# Altium PCB MacroQMK.PcbDoc
Units mil, origin at the board's own origin, x right, y up, seen from the top; angles counter-clockwise.
Board outline 3150 x 2955 mil, 2 copper layers (Top Layer, Bottom Layer), stack 61.855 mil thick; 46 components, 52 nets, 234 pads, 22 vias.
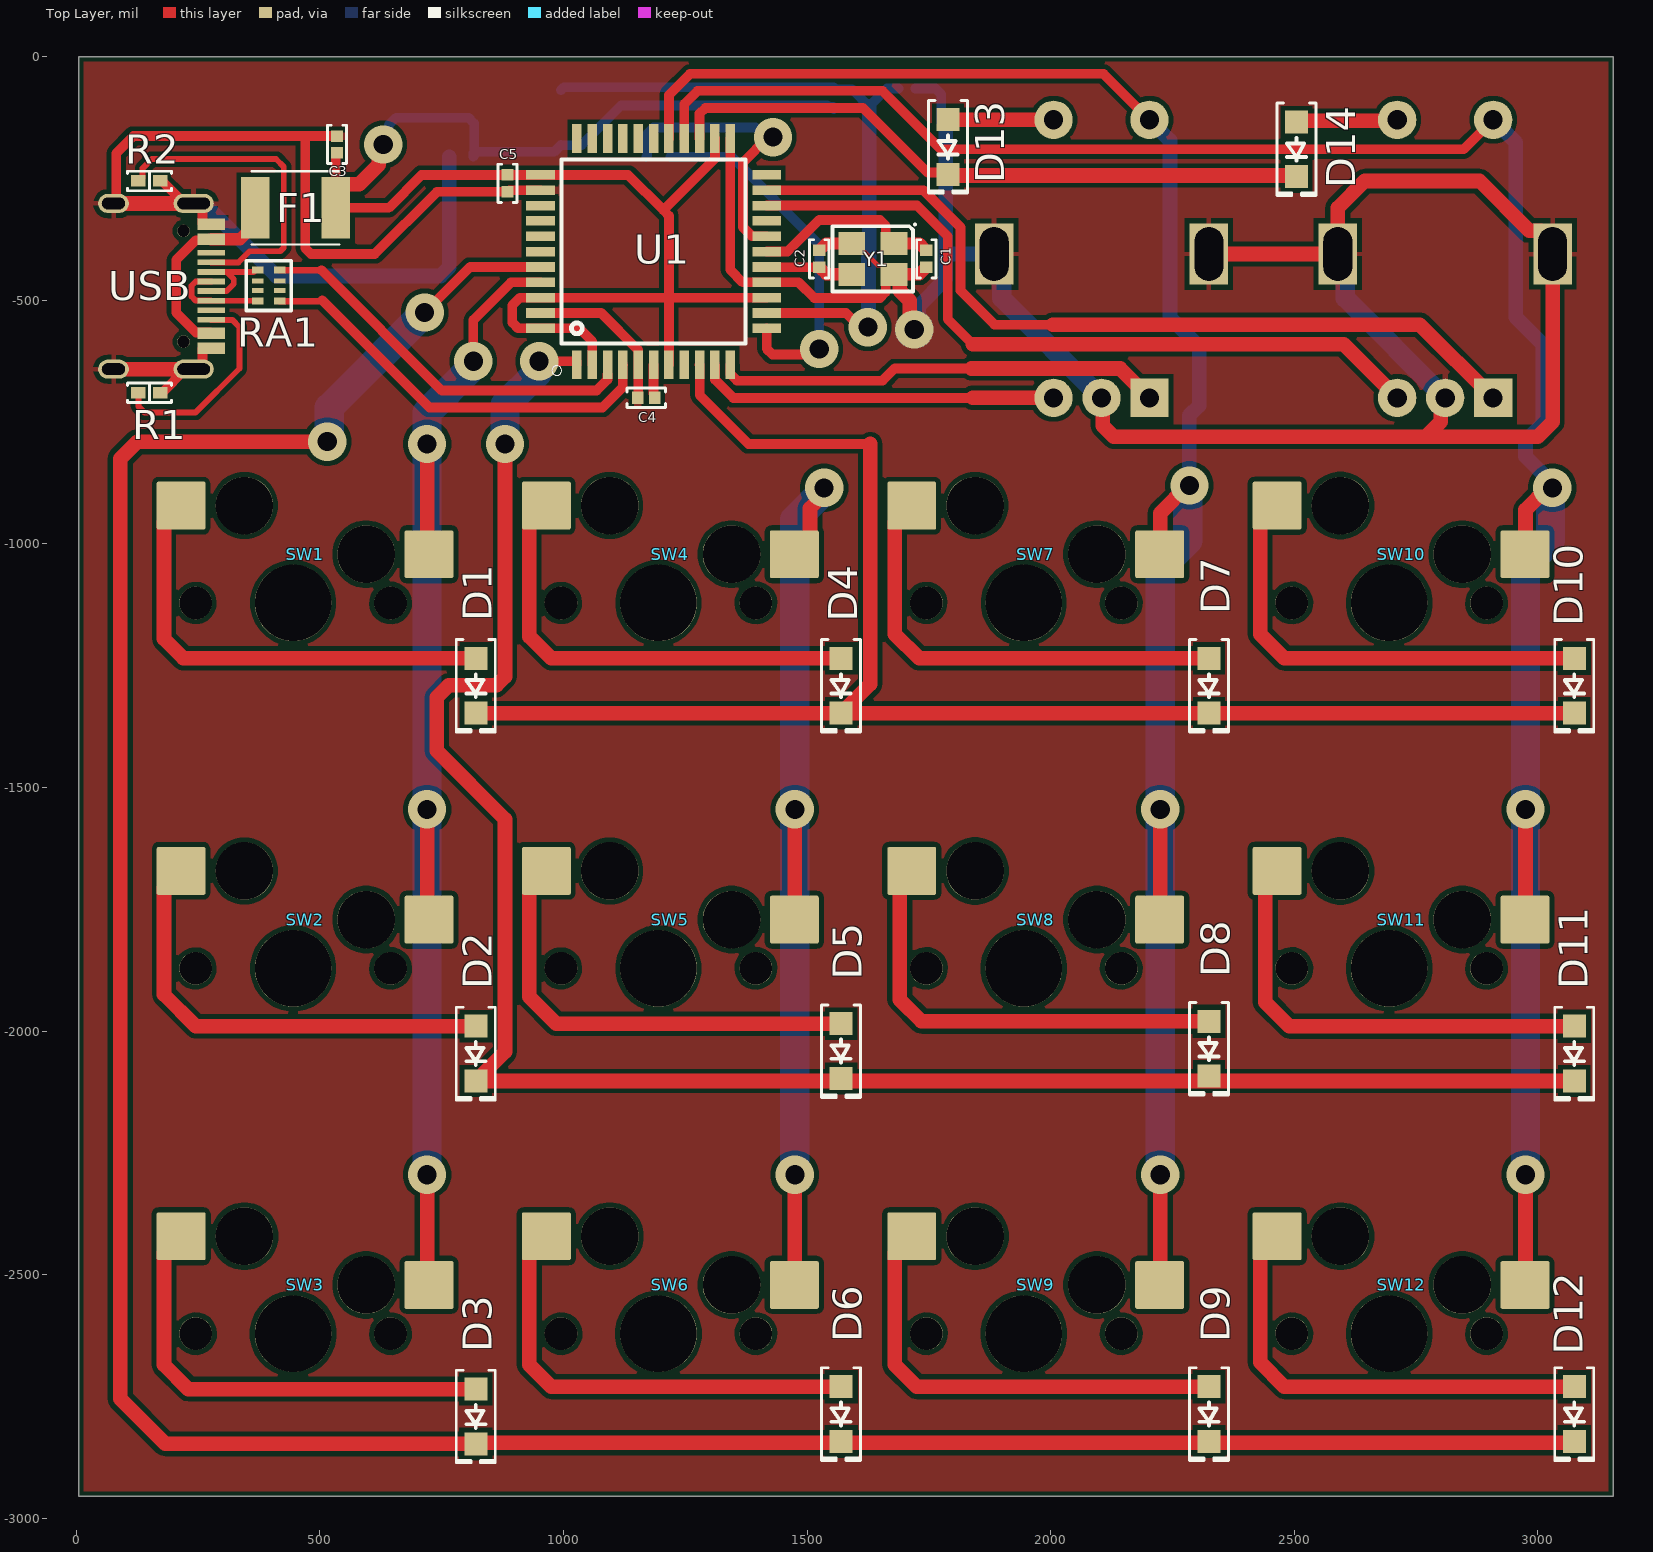
[diagram p0: Top Layer view]
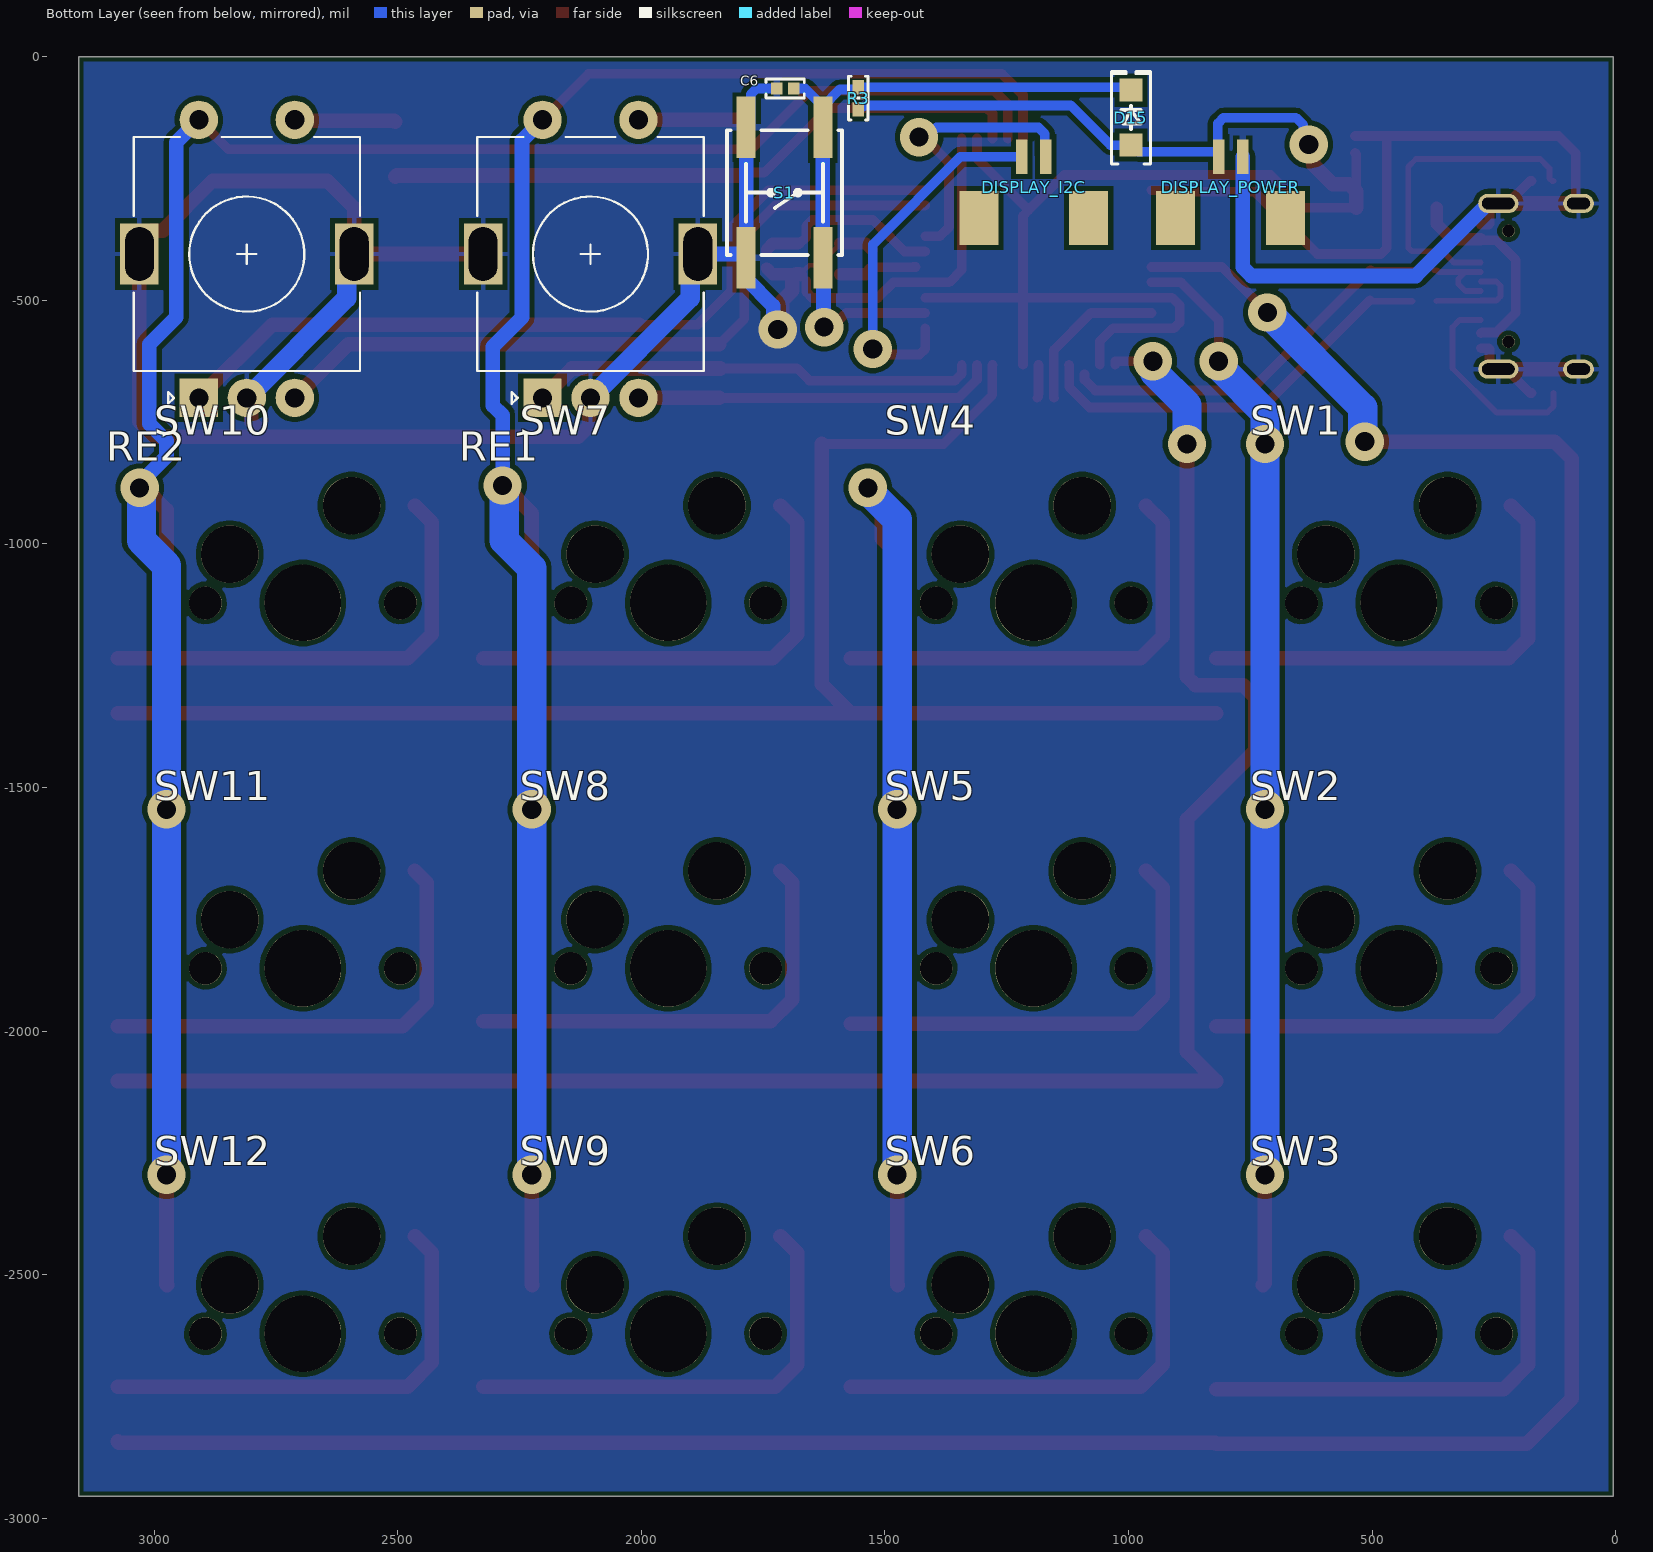
[diagram p1: Bottom Layer view, seen from below]

## Layer stack, top to bottom
Top Solder: solder mask 0.4, Solder Resist, Dk 3.5
Top Layer: signal copper 1.4
Dielectric 1: core 59.0551, FR4, Dk 4.6
Bottom Layer: signal copper 1.4
Bottom Solder: solder mask 0.4, Solder Resist, Dk 3.5

## Board outline
5,-2955 3155,-2955 3155,0 5,0
cut-out: -915,-5000 -905,-5000 -905,-4990 -915,-4990
cut-out: -915,-5000 -905,-5000 -905,-4990 -915,-4990

## Design rules (kind name [scope] priority, off if disabled: settings)
BoardOutlineClearance [All] p1: gap=10 ignorepadtopadclearanceinfootprint=FALSE except(0: Arc-SplitContinuation Track-SplitContinuation SMDPad-SplitContinuation THPad-SplitContinuation Via-SplitContinuation Fill-SplitContinuation Poly-SplitContinuation Region-SplitContinuation Text-SplitContinuation)
Clearance Clearance_RF [InPadClass('RF')] p1: gap=10 ignorepadtopadclearanceinfootprint=FALSE except(20.16: Arc-Poly Track-Poly SMDPad-Poly THPad-Poly Via-Poly Fill-Poly Poly-Poly)
Clearance [All] p2: gap=5.91 ignorepadtopadclearanceinfootprint=FALSE except(3.94: Region-Region; 10: Arc-Poly Track-Poly SMDPad-Poly THPad-Poly Via-Poly Fill-Poly Poly-Poly Poly-Region Poly-Text Poly-Hole)
DiffPairsRouting [All] p1: maxlimit=20 minlimit=1 mostfreqgap=12 toplayer_minwidth=10 toplayer_maxwidth=20 toplayer_prefwidth=12 bottomlayer_minwidth=10 bottomlayer_maxwidth=20 bottomlayer_prefwidth=12 maxuncoupledlength=500
Height [All] p1: minheight=0 maxheight=2000 prefheight=500
HoleSize [All] p1: absolutevalues=TRUE maxlimit=1000 minlimit=1 maxpercent=80.000 minpercent=20.000
MinimumSolderMaskSliver [All] p1: minsoldermaskwidth=1
PolygonConnect [All] p1: thpad.connectstyle=Relief thpad.reliefconductorwidth=10 thpad.reliefentries=4 thpad.polygonreliefangle="90 Angle" thpad.airgapwidth=10 smdpad.connectstyle=Relief smdpad.reliefconductorwidth=14.37 smdpad.reliefentries=4 smdpad.polygonreliefangle="90 Angle" smdpad.airgapwidth=7.87 via.connectstyle=Direct via.reliefconductorwidth=10 via.reliefentries=4 via.polygonreliefangle="90 Angle" via.airgapwidth=10
RoutingVias [All] p1: holewidth=39.37 width=78.74 viastyle="Through Hole" minholewidth=3.94 minwidth=11.81 maxholewidth=78.74 maxwidth=157.48
SilkToSilkClearance [All] p1: silktosilkclearance=2
SilkToSolderMaskClearance [IsPad] p1: minsilkscreentomaskgap=2 clearancetoexposedcopper=TRUE
SolderMaskExpansion [All] p1: expansion=4 istentingtop=FALSE
Width [All] p1: maxlimit=60 minlimit=10 preferedwidth=20 minimp=50.000000 maximp=50.000000 favimp=50.000000
24 further rules are at their usual default settings.

## Classes and differential pairs
differential pair D: +D_P -D_N

## Components (designator, comment, footprint, x,y, rotation, side; value= is the part's Value field where it differs from the comment)
C1 "22 pF" "CAP 0402_1005" 1745,-415 r270 top
C2 "22 pF" "CAP 0402_1005" 1525,-415 r90 top
C3 "1 µF" "CAP 0402_1005" 535,-180 r90 top
C4 "1 µF" "CAP 0402_1005" 1170,-700 r180 top
C5 "0.1 µF" "CAP 0402_1005" 885,-260 r270 top
C6 "0.1 µF" "CAP 0402_1005" 1705,-65 r0 bottom
D1 "MBR0520" SOD123F 820,-1291.3 r270 top
D2 "MBR0520" SOD123F 820,-2046.3 r270 top
D3 "MBR0520" SOD123F 820,-2791.3 r270 top
D4 "MBR0520" SOD123F 1570,-1291.3 r270 top
D5 "MBR0520" SOD123F 1570,-2041.3 r270 top
D6 "MBR0520" SOD123F 1570,-2786.3 r270 top
D7 "MBR0520" SOD123F 2325,-1291.3 r270 top
D8 "MBR0520" SOD123F 2325,-2036.3 r270 top
D9 "MBR0520" SOD123F 2325,-2786.3 r270 top
D10 "MBR0520" SOD123F 3075,-1291.3 r270 top
D11 "MBR0520" SOD123F 3075,-2046.3 r270 top
D12 "MBR0520" SOD123F 3075,-2786.3 r270 top
D13 "MBR0520" SOD123F 1789.53,-185 r270 top
D14 "MBR0520" SOD123F 2505,-190 r270 top
D15 "MBR0520" SOD123F 995,-125 r90 bottom
DISPLAY_I2C "JST_1.25MM_2P_SMD" JST_1.25MM_2P_SMD 1219.2,-205 r180 bottom
DISPLAY_POWER "JST_1.25MM_2P_SMD" JST_1.25MM_2P_SMD 815,-205 r180 bottom
F1 "MF-MSMF050/60-2" FUSER_MF-MSMF020/60-2 450,-310 r180 top
R1 "5.1k" "RES 0402_1005" 150,-690 r180 top
R2 "5.1k" "RES 0402_1005" 150,-255 r180 top
R3 "5.1k" "RES 0402_1005" 1555,-85 r270 bottom
RA1 "741C083220JP" "RESNET 0804-8 CONCAVE" 395,-470 r180 top
RE1 "RotaryEncoder_EC11" RotaryEncoder_EC11 2104.53,-405 r90 bottom
RE2 "RotaryEncoder_EC11" RotaryEncoder_EC11 2810,-405 r90 bottom
S1 "EVQ-Q2Y03W" "PANASONIC EVQQ2" 1706.26,-278.86 r90 bottom
SW1 "Hotswap Socket" MX-Hotswap-Template 445,-1121.3 r180 bottom
SW2 "Hotswap Socket" MX-Hotswap-Template 445,-1871.3 r180 bottom
SW3 "Hotswap Socket" MX-Hotswap-Template 445,-2621.3 r180 bottom
SW4 "Hotswap Socket" MX-Hotswap-Template 1195,-1121.3 r180 bottom
SW5 "Hotswap Socket" MX-Hotswap-Template 1195,-1871.3 r180 bottom
SW6 "Hotswap Socket" MX-Hotswap-Template 1195,-2621.3 r180 bottom
SW7 "Hotswap Socket" MX-Hotswap-Template 1945,-1121.3 r180 bottom
SW8 "Hotswap Socket" MX-Hotswap-Template 1945,-1871.3 r180 bottom
SW9 "Hotswap Socket" MX-Hotswap-Template 1945,-2621.3 r180 bottom
SW10 "Hotswap Socket" MX-Hotswap-Template 2695,-1121.3 r180 bottom
SW11 "Hotswap Socket" MX-Hotswap-Template 2695,-1871.3 r180 bottom
SW12 "Hotswap Socket" MX-Hotswap-Template 2695,-2621.3 r180 bottom
U1 "ATMEGA32U4-AU" QFP80P1200X1200X120-44N 1185,-400 r90 top
USB "HRO-TYPE-C-31-M-12" HRO-TYPE-C-31-M-12 -26.06,-471.22 r270 top
Y1 "16MHz" "NDK NX3225SA" 1635,-415 r180 top

## Footprints (in the part's own frame and the unit in brackets; to place one, negate y for a bottom-side part, rotate by r counter-clockwise, add the part's x,y. Pads: shape width x height; smd on the part's side, far side on the other; paste and mask are expansions set on the pad)
"CAP 0402_1005" [mm] "Chip Capacitor, 2-Leads, Body 1.02x0.51mm, IPC Medium Density"
  rect 0.6x0.64 smd: 1(-0.44,0) 2(0.44,0)
  silkscreen extent -1,-0.5 1,0.5, body extent -0.5,-0.26 0.5,0.26, height 0.52
FUSER_MF-MSMF020/60-2 [mm]
  rect 1.5x3.2 smd: 1(-2.1,0) 2(2.1,0)
  silkscreen extent -2.27,-1.91 2.27,1.91, body extent -2.27,-1.62 2.27,1.62, height 0.85
HRO-TYPE-C-31-M-12 [mm]
  rect 0.6x1.45 smd: 1(-3.225,7.695) 2(-2.45,7.695) 11(2.45,7.695) 12(3.225,7.695)
  rect 0.3x1.45 smd: 3(-1.75,7.695) 4(-1.25,7.695) 5(-0.75,7.695) 6(-0.25,7.695) 7(0.25,7.695) 8(0.75,7.695) 9(1.25,7.695) 10(1.75,7.695)
  rrect100% 1x2.1 hole 1.7 slot 0.6 at 0 deg: 13(-4.32,6.78) 13(4.32,6.78)
  rrect100% 1x1.6 hole 1.2 slot 0.6 at 0 deg: 13(-4.32,2.6) 13(4.32,2.6)
  round 0.65 hole 0.65: Un1(-2.89,6.25) Un2(2.89,6.25)
  body extent -4.47,0 4.47,7.91, height 3.31
JST_1.25MM_2P_SMD [mm]
  rect 0.6x1.8 smd mask+0.102: 1(0,0) 2(1.25,0)
  rect 2.032x2.8 smd mask+0.102: 3(-2.24,-3.2) 4(3.49,-3.2)
MX-Hotswap-Template [mm]
  rrect8% 2.55x2.5 smd far side: 1(-7.085,2.54) 2(5.842,5.08)
  round 1.702 hole 1.702: Un1(-5.08,0) Un5(5.08,0)
  round 3 hole 3: Un2(-3.81,2.54) Un4(2.54,5.08)
  round 3.988 hole 3.988: Un3(0,0)
  body extent -8.14,0.84 6.36,6.73, height 0.8
"NDK NX3225SA" [mm] "Crystal, 4-Leads, Body 2.50x3.20mm, Pitch 2.20mm, IPC Medium Density"
  rect 1.4x1.2 smd: 1(-1.1,-0.8) 2(1.1,-0.8) 3(1.1,0.8) 4(-1.1,0.8)
  silkscreen extent -2.25,-1.85 2.1,1.7, body extent -1.61,-1.26 1.61,1.26, height 0.6
"PANASONIC EVQQ2" [mm] "Switch. 4-leads, body 6.5x6mm, Panasonic EVQ-Q2Y03W"
  rect 3.2x1 smd mask+0.1: 1(-3.4,-2) 2(3.4,-2) 3(3.4,2) 4(-3.4,2)
  silkscreen extent -3.25,-3 3.25,3, body extent -3.4,-3 3.4,3, height 3.1
QFP80P1200X1200X120-44N [mm]
  rect 1.5x0.5 smd: 1(-5.9,4) 2(-5.9,3.2) 3(-5.9,2.4) 4(-5.9,1.6) 5(-5.9,0.8) 6(-5.9,0) 7(-5.9,-0.8) 8(-5.9,-1.6) 9(-5.9,-2.4) 10(-5.9,-3.2) 11(-5.9,-4) 23(5.9,-4) 24(5.9,-3.2) 25(5.9,-2.4) 26(5.9,-1.6) 27(5.9,-0.8) 28(5.9,0) 29(5.9,0.8) 30(5.9,1.6) 31(5.9,2.4) 32(5.9,3.2) 33(5.9,4)
  rect 0.5x1.5 smd: 12(-4,-5.9) 13(-3.2,-5.9) 14(-2.4,-5.9) 15(-1.6,-5.9) 16(-0.8,-5.9) 17(0,-5.9) 18(0.8,-5.9) 19(1.6,-5.9) 20(2.4,-5.9) 21(3.2,-5.9) 22(4,-5.9) 34(4,5.9) 35(3.2,5.9) 36(2.4,5.9) 37(1.6,5.9) 38(0.8,5.9) 39(0,5.9) 40(-0.8,5.9) 41(-1.6,5.9) 42(-2.4,5.9) 43(-3.2,5.9) 44(-4,5.9)
  silkscreen extent -6.45,-4.8 4.8,5.3, body extent -6,-6 6,6, height 1.12
"RES 0402_1005" [mm] "Chip Resistor, 2-Leads, Body 1.0x0.5mm, IPC Medium Density"
  rect 0.75x0.6 smd: 1(-0.575,0) 2(0.575,0)
  silkscreen extent -1.14,-0.51 1.14,0.51, body extent -0.5,-0.25 0.5,0.25, height 0.35
"RESNET 0804-8 CONCAVE" [mm] "4 resistor 2.0x1.0mm, 0.5mm high"
  rect 0.61x0.365 smd: 1(-0.575,0.808) 4(-0.575,-0.808) 5(0.575,-0.808) 8(0.575,0.808)
  rect 0.61x0.25 smd: 2(-0.575,0.25) 3(-0.575,-0.25) 6(0.575,-0.25) 7(0.575,0.25)
  silkscreen extent -1.17,-1.3 1.17,1.3, body extent -0.52,-1.02 0.53,1.03, height 0.51
RotaryEncoder_EC11 [mm]
  rect 2x2 hole 1: A(-7.5,2.5)
  round 2 hole 1: B(-7.5,-2.5) C(-7.5,0) S1(7,-2.5) S2(7,2.5)
  rect 3.2x2 hole 1.5 slot 2.8 at 0 deg: C(0,-5.6) C(0,5.6)
  silkscreen extent -7.8,-5.9 6.1,5.9, body extent -7.6,-5.6 7.25,6.1, height 26.11
SOD123F [mm] "SODFL, 2-Leads, Body 1.60x3.50mm, IPC Medium Density"
  rect 1.2x1.2 smd: 1(-1.43,0) 2(1.43,0)
  silkscreen extent -2.41,-1.02 2.41,1.02, body extent -1.75,-0.8 1.75,0.8, height 1.1

## Part data
C1 C2: library part CBR04C220J5GAC, "CAP CER 22PF 50V C0G/NP0 0402", Device Package="0402 (1005 Metric)", Manufacturer=KEMET, Operating Temperature="-55°C ~ 125°C", Supplier Part Number 1=399-6174-1-ND, Temperature Coefficient="C0G, NP0", Tolerance=±5%, Voltage - Rated=50V, Applications="RF, Microwave, High Frequency", Capacitance="22 pF", ComponentLink1Description=Datasheet, ComponentLink1URL=https://api.kemet.com/component-edge/download/datasheet/CBR04C220J5GAC.pdf, ComponentLink2Description="DigiKey Link", ComponentLink2URL=https://www.digikey.com/en/products/detail/kemet/CBR04C220J5GAC/2732293, Features="High Q, Low Loss, Ultra Low ESR", id=14, LastUpdated=2023-01-03T20:04:20.640, Lifecycle Status=Active, Minimum Order=1, Mounting Type="Surface Mount, MLCC", Package / Case="0402 (1005 Metric)", Packaging=TapeAndReel, Part Number=CBR04C220J5GAC, Part Status=Active, PartId=1726, Price=0.02, Series="CBR-SMD RF C0G", Size / Dimension="0.039\" L x 0.020\" W (1.00mm x 0.50mm)", Supplier 1=DigiKey, Thickness (Max)="0.022\" (0.55mm)"
C3 C4: library part GRM155C71A105KE11D, "CAP CER 1UF 10V X7S 0402", Device Package="0402 (1005 Metric)", Manufacturer="Murata Electronics", Operating Temperature="-55°C ~ 125°C", Supplier Part Number 1=490-14457-1-ND, Temperature Coefficient=X7S, Tolerance=±10%, Voltage - Rated=10V, Applications="General Purpose", Capacitance="1 µF", ComponentLink1Description=Datasheet, ComponentLink1URL=https://search.murata.co.jp/Ceramy/image/img/A01X/G101/ENG/GRM155C71A105KE11-01.pdf, ComponentLink2Description="DigiKey Link", ComponentLink2URL=https://www.digikey.com/en/products/detail/murata-electronics/GRM155C71A105KE11D/6606086, id=27, LastUpdated=2023-01-03T20:04:20.473, Lifecycle Status=Active, Minimum Order=1, Mounting Type="Surface Mount, MLCC", Package / Case="0402 (1005 Metric)", Packaging=TapeAndReel, Part Number=GRM155C71A105KE11D, Part Status=Active, PartId=1749, Price=0.01, Series=GRM, Size / Dimension="0.039\" L x 0.020\" W (1.00mm x 0.50mm)", Supplier 1=DigiKey, Thickness (Max)="0.024\" (0.60mm)"
C5 C6: library part CL05B104KP5VPNC, "CAP CER 100NF 10V X7R 0402", Device Package="0402 (1005 Metric)", Manufacturer="Samsung Electro-Mechanics", Operating Temperature="-55°C ~ 125°C", Ratings=AEC-Q200, Supplier Part Number 1=1276-CL05B104KP5VPNCCT-ND, Temperature Coefficient=X7R, Tolerance=±10%, Voltage - Rated=10V, Applications=Automotive, Capacitance="0.1 µF", ComponentLink1Description=Datasheet, ComponentLink1URL=https://mm.digikey.com/Volume0/opasdata/d220001/medias/docus/5458/CL05B104KP5VPNC_Spec.pdf, ComponentLink2Description="DigiKey Link", ComponentLink2URL=https://www.digikey.com/en/products/detail/samsung-electro-mechanics/CL05B104KP5VPNC/20498482, id=7736, LastUpdated=2023-11-05T20:02:55.743, Lifecycle Status=Active, Minimum Order=1, Mounting Type="Surface Mount, MLCC", Package / Case="0402 (1005 Metric)", Packaging=TapeAndReel, Part Number=CL05B104KP5VPNC, PartId=56690, Price=0.01, Series=CL, Size / Dimension="0.039\" L x 0.020\" W (1.00mm x 0.50mm)", Supplier 1=DigiKey, Thickness (Max)="0.022\" (0.55mm)"
D1 D2 D3 D4 D5 D6 D7 D8 D9 D10 D11 D12 D13 D14 D15: library part 1N4007W, BOM_Manufacturer="BLUE ROCKET", BOM_Manufacturer Part=1N4007W, BOM_Supplier=LCSC, BOM_Supplier Part=C328592, Contributor=LCEDA_Lib, spicePre=D, spiceSymbolName=1N4007W
DISPLAY_I2C DISPLAY_POWER: Package Display=No, BOM_Supplier=LCSC, BOM_Supplier Part=C49661, Contributor=LCEDA_Lib, spicePre=H, spiceSymbolName=HDR-F-2.54_1x2
F1: library part MF-MSMF020/60-2, "Polymeric PTC Resettable Fuse 60V 500mA Ih Surface Mount 1812 (4532 Metric), Concave", Package="1812 Bourns", Availability="In Stock", Check_prices=https://www.snapeda.com/parts/MF-MSMF020/60-2/Bourns/view-part/?ref=eda, MF=Bourns, MP=MF-MSMF020/60-2, Price=None, Purchase-URL=https://pricing.snapeda.com/search/part/MF-MSMF020/60-2/?ref=eda, SnapEDA_Link=https://www.snapeda.com/parts/MF-MSMF020/60-2/Bourns/view-part/?ref=snap
R1 R2 R3: library part 4.7k, Contributor=LCEDA_Lib, nameAlias=Value(Ω), spicePre=R, spiceSymbolName=R_0603_EU
RA1: "RES ARRAY 4 RES 22 OHM 0804", Manufacturer="CTS Resistor Products", Number Of Resistors=4, Operating Temperature="-55°C ~ 125°C", Package / Case="0804, Concave, Long Side Terminals", Power Per Element=63mW, Resistance (Ohms)=22, Supplier Part Number 1=741C083220JPCT-ND, Temperature Coefficient=±200ppm/°C, Tolerance=±5%, Applications="Automotive AEC-Q200, DDR SDRAM, DRAM, MDDR", Circuit Type=Isolated, ComponentLink1Description=Datasheet, ComponentLink1URL=https://www.ctscorp.com/wp-content/uploads/74x.pdf, ComponentLink2Description="DigiKey Link", ComponentLink2URL=https://www.digikey.com/en/products/detail/cts-resistor-products/741C083220JP/1124480, Height - Seated (Max)="0.020\" (0.50mm)", id=1038, LastUpdated=2023-01-02T21:00:50.070, Lifecycle Status=Active, Minimum Order=1, Mounting Type="Surface Mount", Number Of Pins=8, Packaging=TapeAndReel, Part Number=741C083220JP, Part Status=Active, PartId=1038, Price=0.02, Series=741, Size / Dimension="0.079\" L x 0.039\" W (2.00mm x 1.00mm)", Supplier 1=DigiKey
S1: "SWITCH TACTILE SPST-NO 0.02A 15V", Contact Rating @ Voltage="0.02A @ 15VDC", Manufacturer="Panasonic Electronic Components", Operating Force=350gf, Operating Temperature="-40°C ~ 85°C", Supplier Part Number 1=P12961SCT-ND, Actuator Height Off Pcb, Vertical=3.10mm, Actuator Orientation="Top Actuated", Actuator Type=Standard, Circuit=SPST-NO, ComponentLink1Description=Datasheet, ComponentLink1URL=https://industrial.panasonic.com/ac/cdn/e/control/switch/light-touch/catalog/sw_lt_eng_6s_th.pdf, ComponentLink2Description="DigiKey Link", ComponentLink2URL=http://digikey.com/product-detail/en/panasonic-electronic-components/EVQ-Q2Y03W/P12961SCT-ND/762951, id=27, Illumination=Non-Illuminated, LastUpdated=2020-04-09T09:55:12.503, Lifecycle Status=Active, Minimum Order=1, Mounting Type="Surface Mount", Outline="6.50mm x 6.00mm", Packaging=TapeAndReel, Part Number=EVQ-Q2Y03W, Part Status=Active, Price=0.16, Series=EVQQ2, Supplier 1=DigiKey, Switch Function=Off-Mom, Termination Style="J Lead"
SW1 SW2 SW3 SW4 SW5 SW6 SW7 SW8 SW9 SW10 SW11 SW12: library part MX_Cherry
U1: "AVR AVRÂ® ATmega Microcontroller IC 8-Bit 16MHz 32KB (16K x 16) FLASH 44-TQFP (10x10)", Package="TQFP-44 Microchip", Availability="In Stock", MF="Microchip Technology", MP=ATMEGA32U4-AU, Price=None, Purchase-URL=https://pricing.snapeda.com/search/part/ATMEGA32U4-AU/?ref=eda
Y1: library part NX3225SA-16MHZ-STD-CSR-6, "CRYSTAL 16.0000MHZ 8PF SMD", Esr (Equivalent Series Resistance)="80 Ohms", Frequency Stability=±25ppm, Frequency Tolerance=±15ppm, Load Capacitance=8pF, Manufacturer="NDK America, Inc.", Operating Mode=Fundamental, Operating Temperature="-40°C ~ 85°C", Package / Case="4-SMD, No Lead", Supplier Part Number 1=644-1182-1-ND, ComponentLink1Description=Datasheet, ComponentLink1URL=http://www.ndk.com/images/products/catalog/c_NX3225SA_e.pdf, ComponentLink2Description="DigiKey Link", ComponentLink2URL=http://digikey.com/product-detail/en/ndk-america-inc/NX3225SA-16MHZ-STD-CSR-6/644-1182-1-ND/3125571, Frequency=16MHz, Height - Seated (Max)="0.024\" (0.60mm)", id=577, LastUpdated=2023-01-02T20:58:24.833, Lifecycle Status=Active, Minimum Order=1, Mounting Type="Surface Mount", Packaging=TapeAndReel, Part Number=NX3225SA-16MHZ-STD-CSR-6, Part Status=Active, PartId=577, Price=0.45, Series=NX3225SA, Size / Dimension="0.126\" L x 0.098\" W (3.20mm x 2.50mm)", Supplier 1=DigiKey, Type="MHz Crystal"

## Via types
v1: diameter 78.74, hole 39.37, Top Layer to Bottom Layer, 22 vias

## Nets (pads, with @x,y where several pads share a name; then routed paths per layer and width w, separated by ;. In a path a pad name is that pad's centre, name@x,y a point inside that pad or via, vN(x,y) a via of type N, cw(c..) or ccw(c..) an arc to the next point about the centre after c; other vN are vias at no path point)
5V: C3.1 C5.1 D15.1 DISPLAY_POWER.1 F1.1 R3.2 U1.2 U1.7 U1.14 U1.24 U1.34 U1.42 U1.44 | length 3399.9
  Top Layer w20: F1.1 641.46,-310 708.78,-242.68 C5.1 885.08,-242.6 952.64,-242.6 U1.34 952.87,-242.68 1132.68,-242.68 1205,-315 ; F1.1@532.68,-276.54 532.68,-199.13 534.49,-197.32 C3.1 ; U1.2 1058.86,-632.13 1058.86,-583.86 1032.48,-557.48 U1.44 952.56,-557.32 906.72,-557.32 895,-545.61 895,-510 910.35,-494.65 952.56,-494.65 U1.42 1216.42,-494.49 1216.5,-494.57 ; U1.7 1216.5,-494.57 ; U1.24 1310.98,-209.02 1205,-315 ; U1.14 1216.57,-494.49 1216.5,-494.57 ; 1205,-315 1216.5,-326.5 1216.5,-494.57
  Top Layer w30: F1.1 532.68,-276.54 547.2,-262.01 580.67,-262.01 620.67,-222 620.67,-189.33 v1(630,-180)
  Bottom Layer w20: v1(630,-180) 641.24,-168.76 641.24,-140.3 656.54,-125 805,-125 816.72,-136.72 816.72,-185 816.72,-195 816.72,-203.28 DISPLAY_POWER.1 815,-196.81 816.81,-195 981.3,-195 D15.1 995.27,-181.57 1036.91,-181.57 1118.47,-100 1541.47,-100 1544.35,-102.87 1553.19,-102.87 1555,-104.69 R3.2
CH_COL1: D1.2 D4.2 D7.2 D10.2 U1.9 | length 3286.8
  Top Layer w20: U1.9 1279.65,-632.44 1279.65,-694.65 1380,-795 1630,-795
  Top Layer w30: D1.2 D4.2 ; 1630,-795 1630,-1287.6 D4.2 ; D10.2 D7.2 D4.2
CH_COL2: D2.2 D5.2 D8.2 D11.2 U1.1 | length 4794.2
  Top Layer w20: v1(950,-625) 1027.36,-625 1027.52,-625.16 U1.1
  Top Layer w30: v1(880,-795) 880,-1272.43 862.43,-1290 765,-1290 740,-1315 740,-1425 880,-1565 880,-2042.6 D2.2 ; D5.2@1570,-2102.6 D2.2 ; D11.2 D2.2
  Bottom Layer w60: v1(880,-795) 880,-715 946.41,-648.59 946.41,-628.59 v1(950,-625)
CH_COL3: D3.2 D6.2 D9.2 D12.2 U1.40 | length 6019.4
  Top Layer w20: v1(715,-525) 808.5,-431.5 U1.40
  Top Layer w30: v1(515.24,-790) 125,-790 90,-825 90,-2755 182.6,-2847.6 D3.2 822.5,-2845.1 3072.5,-2845.1 D12.2
  Bottom Layer w20: v1(515.24,-790) v1@519.37,-785.87
  Bottom Layer w60: v1@519.37,-785.87 519.37,-720.63 v1(715,-525)
CH_COL4: D13.2 D14.2 U1.25 | length 1339.9
  Top Layer w20: U1.25 1279.49,-116.72 1291.2,-105 1615,-105 1747.62,-237.62 1785.85,-237.62 D13.2
  Top Layer w30: D13.2 1792.03,-243.8 2502.5,-243.8 D14.2
CH_ROW1: SW1.1 SW2.1 SW3.1 U1.41 | length 2647.8
  Top Layer w20: v1(815,-625) 815,-540 891.85,-463.15 952.56,-463.15 U1.41
  Top Layer w30: v1(720,-2295) 720,-2517.36 SW3.1 ; v1(720,-1545) 720,-1767.36 SW2.1 ; v1(720,-795) 720,-1017.36 SW1.1
  Bottom Layer w60: v1(720,-2295) v1(720,-1545) 720,-730 811.41,-638.59 811.41,-628.59 v1(815,-625)
CH_ROW2: SW4.1 SW5.1 SW6.1 | length 2049.9
  Top Layer w30: SW6.1 1475,-2520.24 v1(1475,-2295) ; SW5.1 1475,-1770.24 v1(1475,-1545) ; SW4.1 1506.1,-989.14 1506.1,-927.09 1535,-898.19 v1(1535,-885)
  Bottom Layer w60: v1(1475,-2295) 1475,-950.07 1535,-890.07 v1(1535,-885)
CH_ROW3: RE1.S2 SW7.1 SW8.1 SW9.1 U1.27 | length 3995.7
  Top Layer w20: U1.27 1216.65,-167.56 1216.65,-78.35 1260,-35 2108.54,-35 RE1.S2
  Top Layer w30: SW9.1 2225,-2520.24 v1(2225,-2295) ; SW8.1 2225,-1770.24 v1(2225,-1545) ; SW7.1 2225,-1020.24 2225,-936.81 2281.81,-880 v1(2285,-880)
  Bottom Layer w30: RE1.S2 2245,-171.46 2245,-535 2305,-595 2305,-715.91 2285,-735.91 v1(2285,-880)
  Bottom Layer w60: v1(2225,-2295) v1(2225,-1545) 2225,-1049.37 2281.41,-992.96 2281.41,-883.59 v1(2285,-880)
CH_ROW4: RE2.S2 SW10.1 SW11.1 SW12.1 U1.26 | length 4703.7
  Top Layer w20: U1.26 1248.15,-167.56 1248.15,-96.85 1275,-70 1654.86,-70 1774.86,-190 2847.83,-190 RE2.S2
  Top Layer w30: SW12.1 2975,-2520.24 v1(2975,-2295) ; SW11.1 2975,-1770.24 v1(2975,-1545) ; SW10.1 2975,-1020.24 2975,-930 3020,-885 v1(3030,-885)
  Bottom Layer w30: RE2.S2 2955,-175.98 2955,-535 3010,-590 3010,-753.06 2975,-788.06 2975,-820.68 3030,-875.68 v1(3030,-885)
  Bottom Layer w60: v1(2975,-2295) v1(2975,-1545) 2975,-1044.37 3026.41,-992.96 3026.41,-888.59 v1(3030,-885)
D+: RA1.1 U1.4 | length 856.8
  Top Layer w14: RA1.1 503.21,-501.79
  Top Layer w20: 505,-500 725,-720 1080,-720 1121.85,-678.15 1121.85,-632.44 U1.4
D-: RA1.4 U1.3 | length 795.1
  Top Layer w14: RA1.4 503.21,-438.21
  Top Layer w20: 503.21,-438.21 750,-685 1068.16,-685 1090.35,-662.81 U1.3@1090.35,-651.81
D_N: RA1.5 USB.5 USB.7 | length 179.9
  Top Layer w12: USB.7 276.98,-480.97 308.59,-480.97 323.2,-466.35 323.2,-456.41 308.58,-441.79 ; USB.5 364.06,-441.69 367.54,-438.21 RA1.5
D_P: RA1.8 USB.6 USB.8 | length 201.2
  Top Layer w12: USB.6 276.8,-461.47 245.19,-461.47 236.44,-470.23 236.44,-491.9 245.19,-500.65 276.8,-500.65 USB.8 367.13,-500.75 RA1.8@367.85,-501.48
GND: C1.2 C2.2 C3.2 C4.2 C5.2 C6.2 DISPLAY_POWER.2 R1.1 R2.1 RE1.C RE2.C S1.3 S1.4 U1.5 U1.15 U1.23 U1.35 U1.43 USB.1 USB.12 USB.13 Y1.2 Y1.4 | length 7914.2
  Top Layer w10: Y1.2 1610.32,-402.13 1619.14,-402.13 1644.89,-427.87 1655.75,-427.87 Y1.4@1663.51,-435.64
  Top Layer w20: USB.13@76.3,-301.14 81.84,-295.6 81.84,-198.16 117.32,-162.68 470,-162.68 ; R1.1 175.59,-690 USB.13@224.29,-641.3 ; R2.1 175.59,-255 USB.13@221.73,-301.14 ; USB.13@240.87,-641.3 249.93,-641.3 258.88,-632.35 258.88,-600 260.69,-598.19 USB.12 ; USB.13@240.87,-301.14 249.93,-301.14 258.88,-310.09 258.88,-342.44 260.69,-344.25 USB.1 ; C3.2 470,-162.68 ; U1.43 1077.57,-525.98 1153.35,-601.76 1153.35,-632.13 U1.5 1153.35,-632.44 1153.35,-699.33 C4.2 ; U1.35 889.09,-274.02 885.79,-277.32 C5.2 740.04,-277.32 612.36,-405 481.72,-405 470,-393.28 470,-162.68 ; U1.23 1342.48,-437.48 1367.99,-462.99 1482.99,-462.99 1515,-495 1649.77,-495 1661.49,-483.28 Y1.4@1661.49,-460.12 ; C2.2 1525.79,-397.68 1527.6,-395.87 C2.2@1527.6,-395.22 ; C1.2@1742.4,-434.78 1742.4,-434.13 1744.21,-432.32 C1.2
  Top Layer w25: C2.2@1527.6,-395.22 1539.31,-383.5 Y1.2 ; Y1.4@1681.8,-446.5 1730.69,-446.5 C1.2@1742.4,-434.78
  Top Layer w30: USB.13@76.3,-641.3 224.29,-641.3 USB.13@240.87,-641.3 ; USB.13@76.3,-301.14 221.73,-301.14 USB.13@240.87,-301.14 ; Y1.4@1675.11,-446.5 Y1.4 1681.8,-446.5 1690.42,-455.12 1690.42,-480.42 1710.67,-500.67 1710.67,-550.67 v1(1720,-560) ; RE1.C@2104.53,-700.28 2107.06,-702.81 2107.06,-757.06 2130,-780 2770,-780 ; RE1.C@2325,-405 2589.53,-405 2589.53,-310.47 2645,-255 2880.47,-255 2982.48,-357.01 3006.1,-357.01 3030.47,-381.38 3030.47,-405 3030.47,-749.53 3000,-780 2770,-780 ; RE2.C@2810,-700.28 2800.67,-709.6 2800.67,-749.33 2770,-780
  Bottom Layer w20: C6.2 1763.6,-65 1775.31,-76.72 1775.31,-135.31 S1.3
  Bottom Layer w30: USB.13@240.87,-301.14 261.14,-301.14 410,-450 748.23,-450 765.8,-432.43 DISPLAY_POWER.2 ; v1(1720,-560) 1729.33,-550.67 1729.33,-511.7 1785,-456.02 S1.4 S1.4@1785,-409.69 ; S1.3 S1.4@1785,-409.69 ; RE1.C@1899.65,-420.6 1884.06,-405 1789.69,-405 S1.4@1785,-409.69 ; RE2.C@2589.53,-405 RE2.C@2605.13,-420.6
  Bottom Layer w40: RE1.C@1899.65,-420.6 1899.65,-495.4 RE1.C@2104.53,-700.28 ; RE2.C@2605.13,-420.6 2605.13,-495.4 RE2.C@2810,-700.28
NetC4_1: C4.1 U1.6 | length 68.7
  Top Layer w20: U1.6 1185,-691.81 1185.51,-692.32 1185.51,-698.19 C4.1
NetD1_1: D1.1 SW1.2 | length 945.2
  Top Layer w30: SW1.2 214.21,-921.3 180,-955.51 180,-1195 220,-1235 D1.1
NetD2_1: D2.1 SW2.2 | length 935.6
  Top Layer w30: SW2.2 214.21,-1671.3 180,-1705.51 180,-1925 245,-1990 D2.1
NetD3_1: D3.1 SW3.2 | length 939.4
  Top Layer w30: SW3.2 214.21,-2421.3 180,-2455.51 180,-2685 230,-2735 D3.1
NetD4_1: D4.1 SW4.2 | length 942.3
  Top Layer w30: SW4.2 964.21,-921.3 930,-955.51 930,-1190 975,-1235 D4.1
NetD5_1: D5.1 SW5.2 | length 936.4
  Top Layer w30: SW5.2 964.21,-1671.3 930,-1705.51 930,-1930 985,-1985 D5.1
NetD6_1: D6.1 SW6.2 | length 937.3
  Top Layer w30: SW6.2 964.21,-2421.3 930,-2455.51 930,-2685 975,-2730 D6.1
NetD7_1: D7.1 SW7.2 | length 944.4
  Top Layer w30: SW7.2 1714.21,-921.3 1680,-955.51 1680,-1185 1730,-1235 D7.1
NetD8_1: D8.1 SW8.2 | length 927.2
  Top Layer w30: SW8.2 1690.59,-1695.71 1690.59,-1935.59 1735,-1980 D8.1
NetD9_1: D9.1 SW9.2 | length 942.3
  Top Layer w30: SW9.2 1714.21,-2421.3 1680,-2455.51 1680,-2685 1725,-2730 D9.1
NetD10_1: D10.1 SW10.2 | length 944.4
  Top Layer w30: SW10.2 2464.21,-921.3 2430,-955.51 2430,-1185 2480,-1235 D10.1
NetD11_1: D11.1 SW11.2 | length 934.3
  Top Layer w30: SW11.2 2440.59,-1695.71 2440.59,-1940.59 2490,-1990 D11.1
NetD12_1: D12.1 SW12.2 | length 939.4
  Top Layer w30: SW12.2 2464.21,-2421.3 2430,-2455.51 2430,-2680 2480,-2730 D12.1
NetD13_1: D13.1 RE1.S1 | length 216.9
  Top Layer w30: D13.1 1789.88,-129.06 2005.75,-129.06 RE1.S1
NetD14_1: D14.1 RE2.S1 | length 208.4
  Top Layer w30: D14.1 2507.15,-131.56 2709.43,-131.56 RE2.S1
NetR1_2: R1.2 USB.10 | length 426.8
  Top Layer w12: R1.2 127.36,-717.36 140,-730 245,-730 335,-640 335,-555 320.12,-540.12 USB.10
NetR2_2: R2.2 USB.4 | length 663.1
  Top Layer w12: R2.2 130.32,-255 136.13,-249.19 136.13,-228.87 155,-210 410,-210 425.69,-225.69 425.69,-392.28 418.66,-399.31 355.69,-399.31 332.99,-422.01 USB.4
PB4: U1.28
PB5: U1.29
PB6: U1.30
PC6: U1.31
PC7: U1.32
PD1: U1.19
PE2: U1.33
PF4: U1.39
PF5: U1.38
PF6: U1.37
PF7: U1.36
RE_C1: RE1.B U1.10 | length 741.1
  Top Layer w20: U1.10 1311.14,-632.44 1311.14,-662.81 1348.61,-700.28 1840,-700.28
  Top Layer w30: 1840,-700.28 RE1.B
RE_C2: RE2.B U1.20 | length 1557.4
  Top Layer w20: U1.20 1725.51,-305.51 1789.09,-369.09 1789.09,-539.09 1840,-590
  Top Layer w30: 1840,-590 2601.3,-590 RE2.B
RE_D1: RE1.A U1.11 | length 920.7
  Top Layer w20: U1.11 1342.48,-651.65 1355.83,-665 1655,-665 1680,-640 1837.58,-640
  Top Layer w30: 1837.58,-640 2142.68,-640 RE1.A
RE_D2: RE2.A U1.21 | length 1743.9
  Top Layer w20: U1.21 1739.02,-274.02 1815,-350 1815,-480 1885,-550 2005,-550
  Top Layer w30: 2005,-550 2758.15,-550 RE2.A
RESET: C6.1 D15.2 R3.1 S1.1 S1.2 U1.13 | length 1402.6
  Top Layer w20: U1.13 1580.09,-525.98 1609.11,-555 v1(1625,-555)
  Bottom Layer w20: D15.2 1001.34,-62.36 R3.1 1555,-65.31 1556.81,-67.13 1592.95,-67.13 1627.52,-101.69 1664.21,-65 C6.1
  Bottom Layer w30: v1(1625,-555) 1626.26,-553.74 1626.26,-413.98 S1.1 S1.2 S1.2@1627.52,-101.69
SCK: DISPLAY_I2C.2 U1.18 | length 592.4
  Top Layer w20: U1.18 1417.13,-368.35 1386.76,-368.35 1368.39,-349.97 1368.39,-216.61 1420,-165 v1(1430,-165)
  Bottom Layer w20: DISPLAY_I2C.2 1171.81,-203.19 1171.81,-158.19 1185,-145 1394.11,-145 1414.11,-165 v1(1430,-165)
SDA: DISPLAY_I2C.1 U1.12 | length 754.6
  Top Layer w20: U1.12 1417.28,-599.52 1429,-611.24 1513.76,-611.24 v1(1525,-600)
  Bottom Layer w20: DISPLAY_I2C.1 1345,-205 1525,-385 v1(1525,-600)
VBUS: F1.2 USB.2 USB.11 | length 423.8
  Top Layer w20: USB.11 275.08,-565.87 245.7,-565.87 205,-525.17 205,-417.27 245.7,-376.57 275.08,-376.57 USB.2
  Top Layer w25: USB.2 336.02,-374.76 367.32,-343.46 F1.2
XTAL1: C1.1 U1.17 Y1.1 | length 394.6
  Top Layer w20: U1.17 1460,-400 1525,-335 1649.77,-335 1661.49,-346.72 1661.49,-369.88 1675.11,-383.5 Y1.1 ; C1.1@1742.4,-395.22 1742.4,-395.87 1744.21,-397.68 C1.1
  Top Layer w25: Y1.1 1730.69,-383.5 C1.1@1742.4,-395.22
XTAL2: C2.1 U1.16 Y1.3 | length 161.4
  Top Layer w20: U1.16@1436.81,-431.65 1442.89,-431.65 1443.56,-432.32 C2.1 1525.79,-432.32 1527.6,-434.13 C2.1@1527.6,-434.78
  Top Layer w25: C2.1@1527.6,-434.78 1539.31,-446.5 Y1.3
pads on no net: DISPLAY_I2C.3 DISPLAY_I2C.4 DISPLAY_POWER.3 DISPLAY_POWER.4 RA1.2 RA1.3 RA1.6 RA1.7 SW1.Un1 SW1.Un2 SW1.Un3 SW1.Un4 SW1.Un5 SW2.Un1 SW2.Un2 SW2.Un3 SW2.Un4 SW2.Un5 SW3.Un1 SW3.Un2 SW3.Un3 SW3.Un4 SW3.Un5 SW4.Un1 SW4.Un2 SW4.Un3 SW4.Un4 SW4.Un5 SW5.Un1 SW5.Un2 SW5.Un3 SW5.Un4 SW5.Un5 SW6.Un1 SW6.Un2 SW6.Un3 SW6.Un4 SW6.Un5 SW7.Un1 SW7.Un2 SW7.Un3 SW7.Un4 SW7.Un5 SW8.Un1 SW8.Un2 SW8.Un3 SW8.Un4 SW8.Un5 SW9.Un1 SW9.Un2 SW9.Un3 SW9.Un4 SW9.Un5 SW10.Un1 SW10.Un2 SW10.Un3 SW10.Un4 SW10.Un5 SW11.Un1 SW11.Un2 SW11.Un3 SW11.Un4 SW11.Un5 SW12.Un1 SW12.Un2 SW12.Un3 SW12.Un4 SW12.Un5 U1.8 U1.22 USB.3 USB.9 USB.Un1 USB.Un2

## Polygon pours and split planes (outlines as drawn)
GND on Top Layer "GND_L01_P001" (solid, pour order 1): -5.84,-0.27 3149.16,-0.27 3149.16,-2950.27 3144.16,-2955.27 -10.84,-2955.27
GND on Bottom Layer "GND_L02_P000" (solid, pour order 0): 0,0 3155,0 3155,-2950 3150,-2955 -5,-2955

## Silkscreen, mask and mechanical layers (free items; w line width, h text height)
Board:
  the board outline again, w47.24
Mechanical 4:
  the board outline again, w47.24